# EAGLE board AtMEGA32u4-uSD-AddON (EAGLE 5.11)
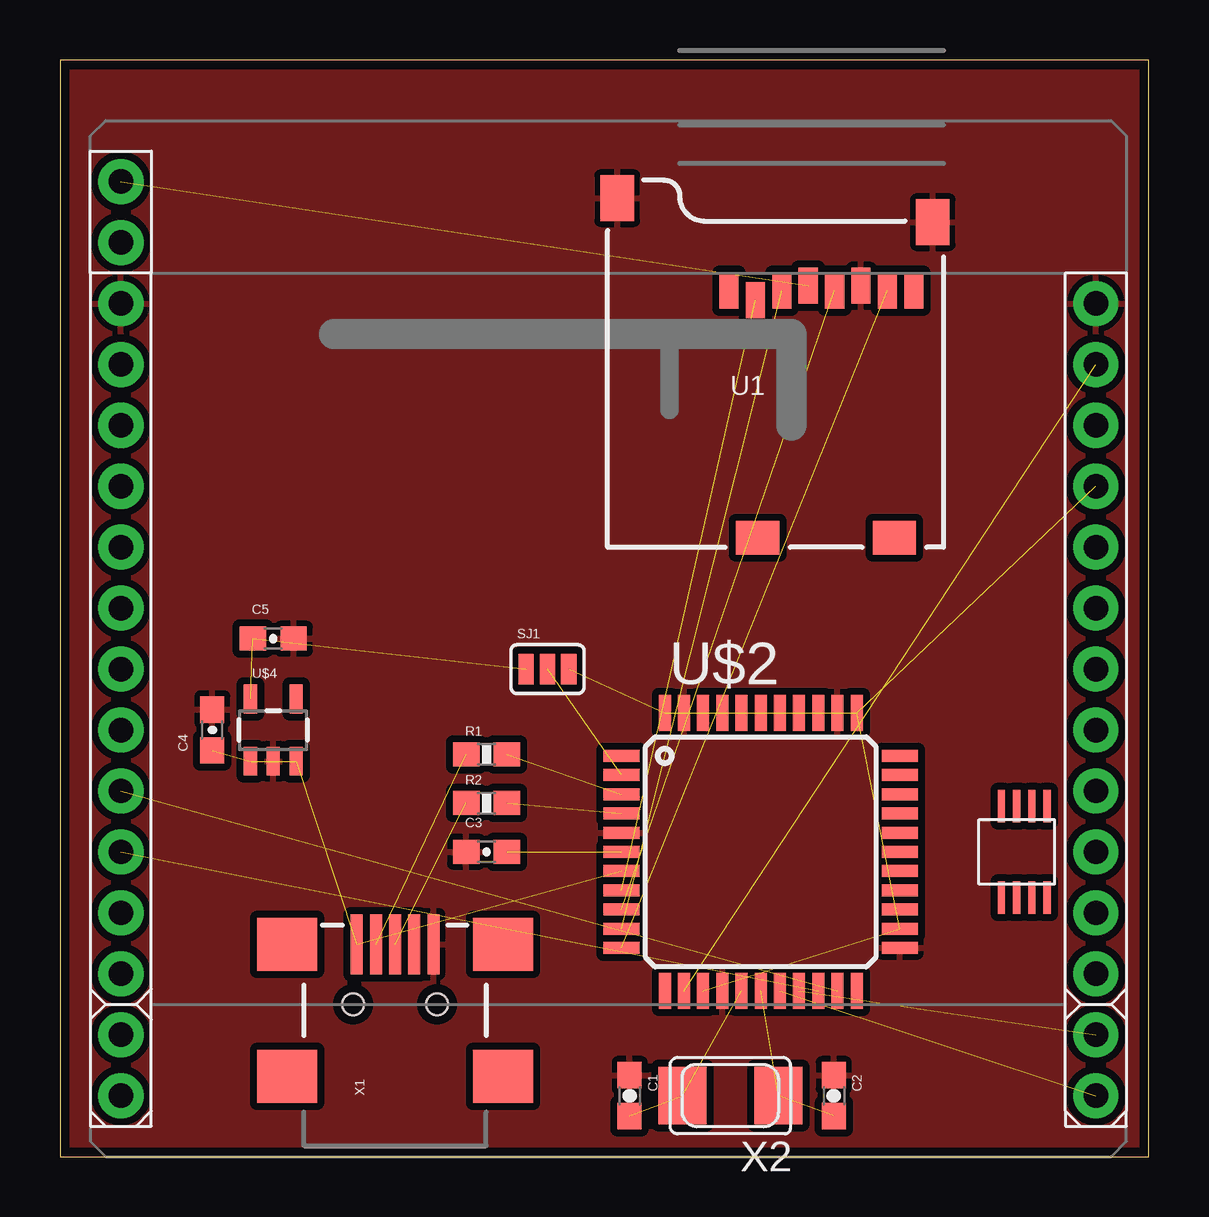
[diagram p0: board, top side]

Size 45.39 x 45.71 mm. Coordinates in mm from the lower left corner, seen from the top.
Outline: 0,0 45.39,0 45.39,45.71 0,45.71 0,0
Copper layers (1*16): Top 0.0356mm / dielectric 1.5011mm / Bottom 0.0356mm
Design rules "LaenPCBOrder-JCModified": minimum track width 6mil, minimum drill 13mil, track to track 6mil, track to pad 6mil, pad to pad 6mil, via to via 6mil, smd to smd 6mil, copper to edge 15mil, drill to drill 6mil, minimum pad ring 12mil, minimum via ring 7mil, stop-mask expansion 4mil, vias tented up to drill 25mil, thermal gap 10mil
Net classes: 0 default: width 0.254 mm; 1 smallsignal: width 0.152 mm; 2 bigsignal: width 0.356 mm

## Footprints (pad centres in the part's own frame; a part is rotated, then mirrored left to right if it is on the bottom)
0603-CAP = smd 1.1 x 1: 1 -0.85,0; 2 0.85,0
0603-RES = smd 1.1 x 1: 1 -0.85,0; 2 0.85,0
SJ_3_PASTE2&3 = smd 0.635 x 1.27: 1 -0.889,0; 2 0,0; 3 0.889,0
MICRO-SD-SOCKET-PP = smd 0.8 x 1.5: 1 -8.94,10.7; 2 -7.84,10.3; 3 -6.74,10.7; 4 -5.64,10.9; 5 -4.54,10.7; 6 -3.44,10.9; 7 -2.34,10.7; 8 -1.24,10.7 | smd 1.8 x 1.4: CD1 -2.05,0.4; CD2 -7.75,0.4 | smd 1.4 x 1.9: GND1 -13.6,14.55; GND3 -0.45,13.55
SYNSJ-STACK = drill 1.016 pad 1.88 round: G0 0,-7.62; G1 0,-10.16; G2 0,-12.7; G3 0,-15.24; G4 0,-17.78; G5 0,-20.32; G6 0,-22.86; G7 0,-25.4; G8 0,-27.94; G9 0,-30.48; G10 0,-33.02; G11 40.64,-33.02; G12 40.64,-30.48; G13 40.64,-27.94; G14 40.64,-25.4; G15 40.64,-22.86; G16 40.64,-20.32; G17 40.64,-17.78; G18 40.64,-15.24; GND 0,-5.08; GND1 40.64,-5.08; R1 0,0; R2 0,-2.54; R3 0,-35.56; R4 0,-38.1; R5 40.64,-38.1; R6 40.64,-35.56; RESERVED 40.64,-10.16; RESET 40.64,-7.62; VCC 40.64,-12.7
TQFP44 = smd 1.5 x 0.5: 1 -5.8,4; 2 -5.8,3.2; 3 -5.8,2.4; 4 -5.8,1.6; 5 -5.8,0.8; 6 -5.8,0; 7 -5.8,-0.8; 8 -5.8,-1.6; 9 -5.8,-2.4; 10 -5.8,-3.2; 11 -5.8,-4; 23 5.8,-4; 24 5.8,-3.2; 25 5.8,-2.4; 26 5.8,-1.6; 27 5.8,-0.8; 28 5.8,0; 29 5.8,0.8; 30 5.8,1.6; 31 5.8,2.4; 32 5.8,3.2; 33 5.8,4 | smd 0.5 x 1.5: 12 -4,-5.8; 13 -3.2,-5.8; 14 -2.4,-5.8; 15 -1.6,-5.8; 16 -0.8,-5.8; 17 0,-5.8; 18 0.8,-5.8; 19 1.6,-5.8; 20 2.4,-5.8; 21 3.2,-5.8; 22 4,-5.8; 34 4,5.8; 35 3.2,5.8; 36 2.4,5.8; 37 1.6,5.8; 38 0.8,5.8; 39 0,5.8; 40 -0.8,5.8; 41 -1.6,5.8; 42 -2.4,5.8; 43 -3.2,5.8; 44 -4,5.8
DCT = smd 0.3 x 1.35: 1 -1.27,-1.905; 2 -0.635,-1.905; 3 0,-1.905; 4 0.635,-1.905; 5 0.635,1.905; 6 0,1.905; 7 -0.635,1.905; 8 -1.27,1.905
SOT23-5 = smd 0.55 x 1.2: 1 -0.95,-1.3; 2 0,-1.3; 3 0.95,-1.3; 4 0.95,1.3; 5 -0.95,1.3
USB-MINIB = smd 2.5 x 0.5: D+ 2.5,0; D- 2.5,0.8; GND 2.5,-1.6; ID 2.5,-0.8; VBUS 2.5,1.6 | smd 2.2 x 2.5: GND@1 -3,-4.5; GND@2 -3,4.5; GND@3 2.5,4.5; GND@4 2.5,-4.5 | hole 0.9: 0,1.75; 0,-1.75
NX5032 = smd 2 x 2.4: P$1 2,0; P$2 -2,0

## Placement (x,y rotation side)
C1  22pF  [0603-CAP]  23.75,2.54 270 top
C2  22pF  [0603-CAP]  32.26,2.54 270 top
C3  1uF  [0603-CAP]  17.78,12.7 0 top
C4  1uF  [0603-CAP]  6.35,17.78 90 top
C5  1uF  [0603-CAP]  8.89,21.59 0 top
R1  22  [0603-RES]  17.78,16.76 0 top
R2  22  [0603-RES]  17.78,14.73 0 top
SJ1  [SJ_3_PASTE2&3]  20.32,20.32 0 top
U1  USD-SOCKETNEW  [MICRO-SD-SOCKET-PP]  36.83,25.4 0 top
U$1  SYNAPSE-SJ-STCKINGD30-1600  [SYNSJ-STACK]  2.54,40.64 0 top
U$2  ATMEGA32U4-AU  [TQFP44]  29.21,12.7 0 top
U$3  PCA9306DCT  [DCT]  39.88,12.7 180 top
U$4  MCP1802  [SOT23-5]  8.89,17.78 0 top
X1  USBSMD  [USB-MINIB]  13.97,6.35 90 top
X2  [NX5032]  27.94,2.54 180 top

## Library data of the parts
C1 C2 SJ1 = SparkFun
C3-C5 R1 R2 U$1 U$3 U$4 X1 = 0_jc-custom
U1 = 0_jc-modified
U$2 X2 = adafruit

## Nets
GND: C1.1 C2.1 C3.1 C4.2 C5.2 U1.6 U1.GND1 U1.GND3 U$1.GND U$1.GND1 U$2.5 U$2.15 U$2.23 U$2.35 U$2.43 U$4.2 X1.GND
HWB: U$2.33
MISO: U1.7 U$2.11
MOSI: U1.3 U$2.10
MVOUT: C5.1 SJ1.1 U$4.5
N$1: C2.2 U$2.17 X2.P$2
N$2: C1.2 U$2.16 X2.P$1
N$3: SJ1.2 U$2.2
N$4: C3.2 U$2.6
N$5: U$1.R2
N$8: U$2.28
N$9: U$2.29
N$10: U$2.30
N$11: U$2.12
N$13: U$2.27
N$14: U$2.26
N$15: U$2.22
N$16: U$2.25
N$20: U$2.32
N$21: U$2.31
N$22: U$2.1
N$24: U$2.36
N$25: U$2.37
N$26: U$2.38
N$27: U$2.39
N$28: U$2.40
N$29: U$2.41
N$30: R1.1 X1.D-
N$31: R2.1 X1.D+
N$33: R1.2 U$2.3
N$34: R2.2 U$2.4
N$36: U1.8
N$38: U1.CD1
N$40: U1.CD2
RESET: U$1.RESET U$2.13
RX1: U$1.G7 U$2.21
SCK: U1.5 U$2.9
SCL: U$1.R5 U$2.18
SD_CS: U1.2 U$2.8
SDA: U$1.R6 U$2.19
TX1: U$1.G8 U$2.20
VBUS: C4.1 U$2.7 U$4.1 U$4.3 X1.VBUS
VCC3: SJ1.3 U$1.VCC U$2.14 U$2.24 U$2.34 U$2.44
VCC3A: U1.4 U$1.R1

## Tracks (layer width: path | path; a pad name or v marks a point on that pad's centre or on a via)
GND
  pour Top (isolate 0.305): 0,45.72 45.72,45.72 45.72,0 0,0
MISO  (1 unrouted)
MOSI  (1 unrouted)
MVOUT  (2 unrouted)
N$1  (2 unrouted)
N$2  (2 unrouted)
N$3  (1 unrouted)
N$4  (1 unrouted)
N$30  (1 unrouted)
N$31  (1 unrouted)
N$33  (1 unrouted)
N$34  (1 unrouted)
RESET  (1 unrouted)
RX1  (1 unrouted)
SCK  (1 unrouted)
SCL  (1 unrouted)
SD_CS  (1 unrouted)
SDA  (1 unrouted)
TX1  (1 unrouted)
VBUS  (4 unrouted)
VCC3  (5 unrouted)
VCC3A  (1 unrouted)